# Altium PCB BEE-PC_EXP_V100.PcbDoc (part 3 of 7)
Units mm, origin at the board's own origin, x right, y up, seen from the top; angles counter-clockwise.
Board outline 180 x 79.98 mm, 6 copper layers (L1 TOP, L2 GND 1, L3 SIGNAL, L4 PWR, L5 GND 2, L6 BOT), stack 1.536 mm thick; 1146 components, 909 nets, 3933 pads, 1234 vias.
Unrouted connection lines stored in the file: 1783.
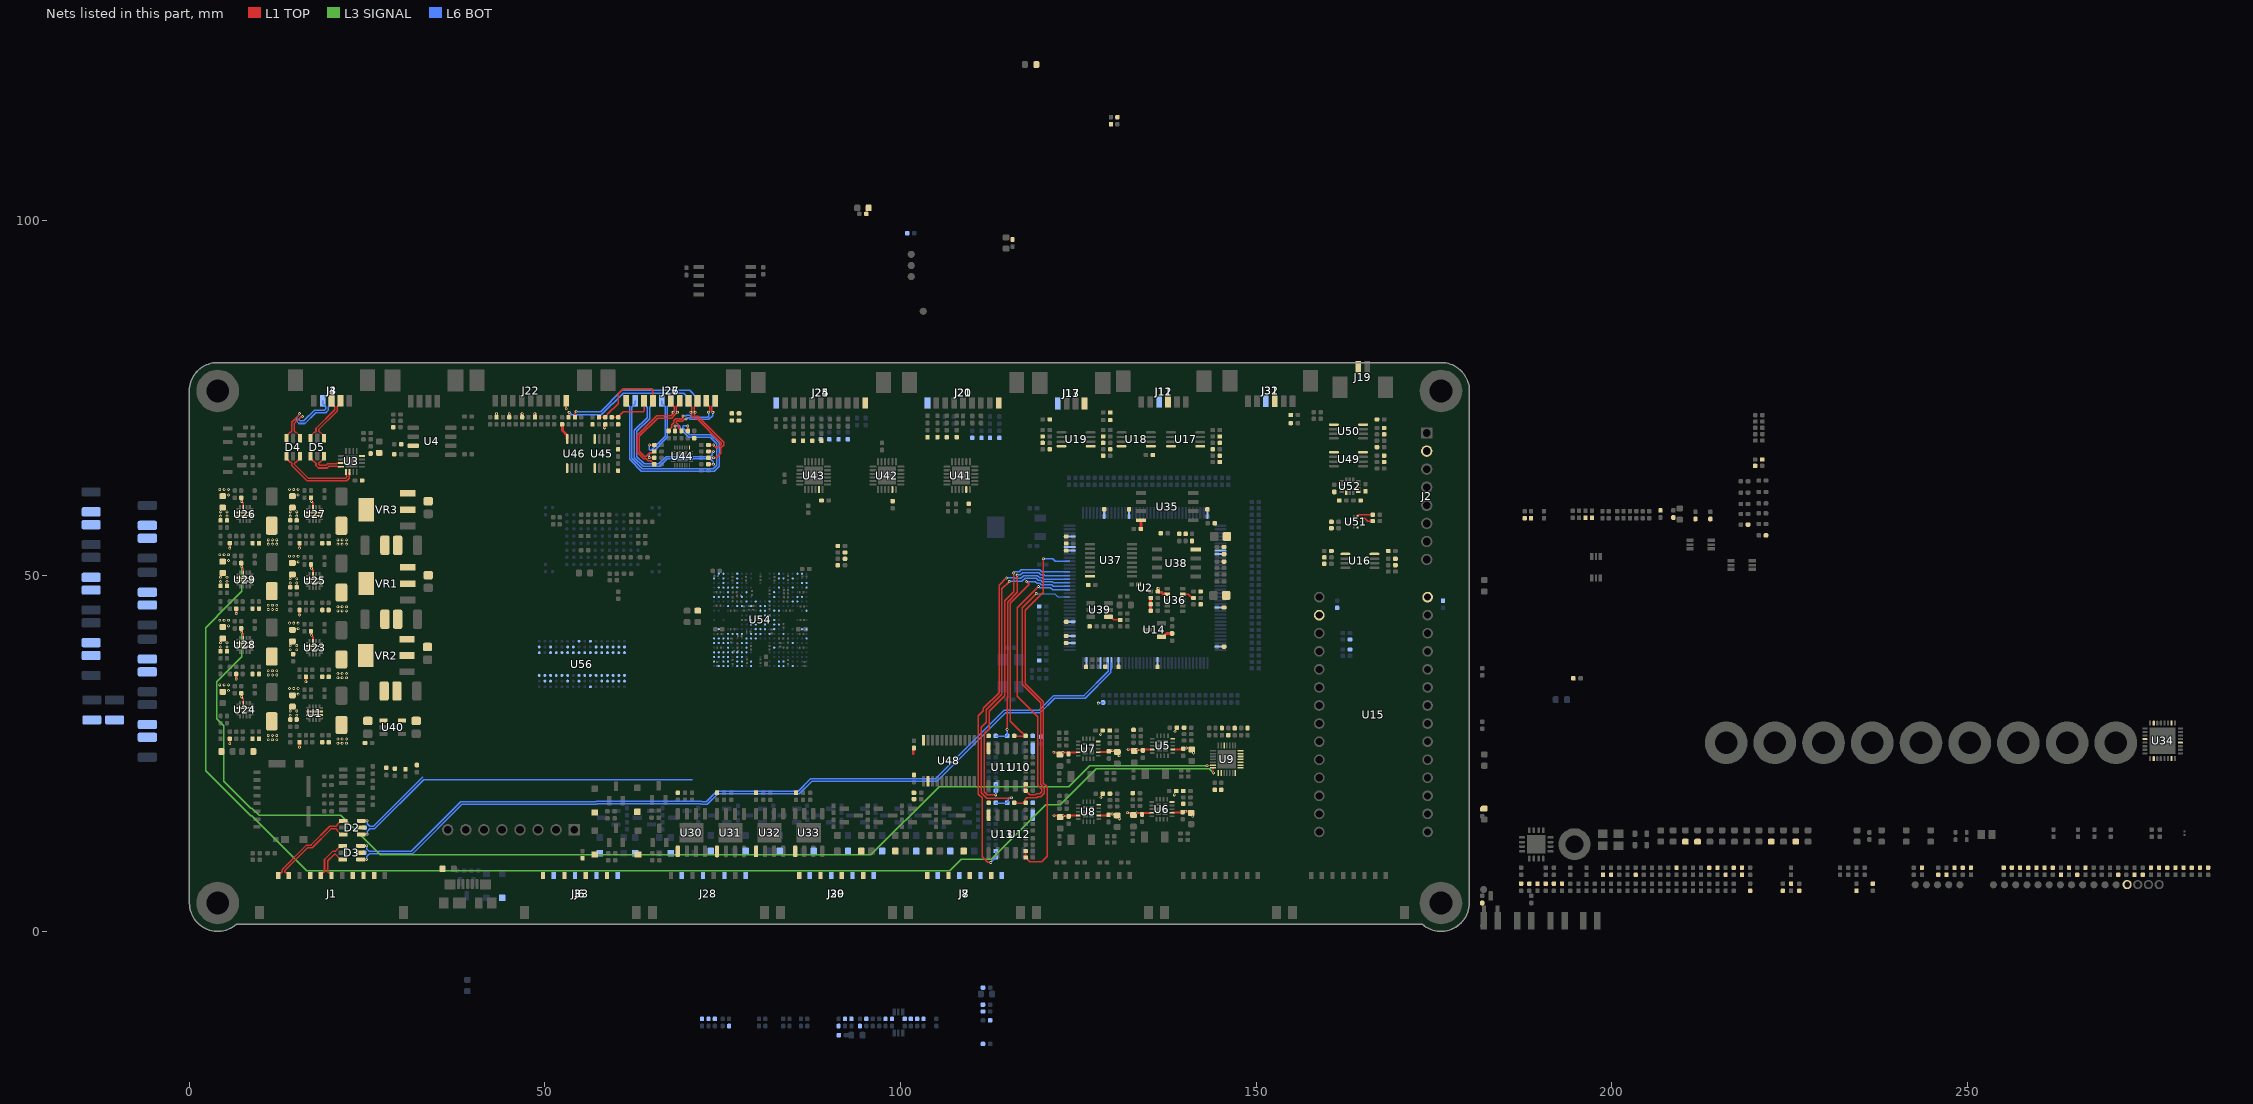
[diagram p4: the nets of this part, all layers, seen from the top]

## Footprints (in the part's own frame and the unit in brackets; to place one, negate y for a bottom-side part, rotate by r counter-clockwise, add the part's x,y. Pads: shape width x height; smd on the part's side, far side on the other; paste and mask are expansions set on the pad) (continued)
SOT95P280X145-6N [mm]
  rrect25% 1.21x0.59 smd: 1(-1.255,0.95) 2(-1.255,0) 3(-1.255,-0.95) 4(1.255,-0.95) 5(1.255,0) 6(1.255,0.95)
  silkscreen extent -1.9,-1.5 0.82,1.5, body extent -1.4,-1.46 1.4,1.46, height 1.4
SOT-23-3 [mm]
  rrect25% 1.32x0.6 smd: 1(-1,0.95) 2(-1,-0.95) 3(1,0)
  silkscreen extent -1.6,-1.5 0.7,1.5, body extent -1.3,-1.52 1.3,1.52, height 1.2
Testpoint_TH_D130H80 [mm]
  round 1.3 hole 0.8 paste-2539.97 mask+0: 0(0,0)
Testpoint_TH_D450H250 [mm]
  round 4.5 / inner round 3.5 / far side round 4.5 hole 2.5 paste-2539.97 mask+0: 1(0,0)
TFBGA-343_14x14 [mm] "BGA, 343-Leads, Body 14,00mm x14,00mm, Pitch 0,65mm"
  round 0.3 smd mask+0.05: A1(-6.5,6.5) A2(-5.85,6.5) A3(-5.2,6.5) A4(-4.55,6.5) A5(-3.9,6.5) A6(-3.25,6.5) A7(-2.6,6.5) A8(-1.95,6.5) A9(-1.3,6.5) A11(0,6.5) A13(1.3,6.5) A14(1.95,6.5) A15(2.6,6.5) A16(3.25,6.5) A17(3.9,6.5) A18(4.55,6.5) A19(5.2,6.5) A20(5.85,6.5) A21(6.5,6.5) AA1(-6.5,-6.5) AA2(-5.85,-6.5) AA3(-5.2,-6.5) AA4(-4.55,-6.5) AA5(-3.9,-6.5) AA6(-3.25,-6.5) AA7(-2.6,-6.5) AA8(-1.95,-6.5) AA9(-1.3,-6.5) AA11(0,-6.5) AA13(1.3,-6.5) AA14(1.95,-6.5) AA15(2.6,-6.5) AA16(3.25,-6.5) AA17(3.9,-6.5) AA18(4.55,-6.5) AA19(5.2,-6.5) AA20(5.85,-6.5) AA21(6.5,-6.5) B1(-6.5,5.85) B2(-5.85,5.85) B3(-5.2,5.85) B4(-4.55,5.85) B6(-3.25,5.85) B7(-2.6,5.85) B9(-1.3,5.85) B13(1.3,5.85) B15(2.6,5.85) B16(3.25,5.85) B18(4.55,5.85) B19(5.2,5.85) B20(5.85,5.85) B21(6.5,5.85) C1(-6.5,5.2) C2(-5.85,5.2) C3(-5.2,5.2) C4(-4.55,5.2) C5(-3.9,5.2) C6(-3.25,5.2) C7(-2.6,5.2) C8(-1.95,5.2) C11(0,5.2) C14(1.95,5.2) C15(2.6,5.2) C16(3.25,5.2) C17(3.9,5.2) C18(4.55,5.2) C19(5.2,5.2) C20(5.85,5.2) C21(6.5,5.2) D1(-6.5,4.55) D2(-5.85,4.55) D3(-5.2,4.55) D4(-4.55,4.55) D5(-3.9,4.55) D6(-3.25,4.55) D7(-2.6,4.55) D8(-1.95,4.55) D9(-1.3,4.55) D13(1.3,4.55) D14(1.95,4.55) D15(2.6,4.55) D16(3.25,4.55) D17(3.9,4.55) D18(4.55,4.55) D19(5.2,4.55) D20(5.85,4.55) D21(6.5,4.55) E1(-6.5,3.9) E3(-5.2,3.9) E4(-4.55,3.9) E5(-3.9,3.9) E6(-3.25,3.9) E7(-2.6,3.9) E8(-1.95,3.9) E14(1.95,3.9) E15(2.6,3.9) E16(3.25,3.9) E17(3.9,3.9) E18(4.55,3.9) E19(5.2,3.9) E21(6.5,3.9) F1(-6.5,3.25) F2(-5.85,3.25) F3(-5.2,3.25) F4(-4.55,3.25) F5(-3.9,3.25) F6(-3.25,3.25) F7(-2.6,3.25) F8(-1.95,3.25) F9(-1.3,3.25) F13(1.3,3.25) F14(1.95,3.25) F15(2.6,3.25) F16(3.25,3.25) F17(3.9,3.25) F18(4.55,3.25) F19(5.2,3.25) F20(5.85,3.25) F21(6.5,3.25) G1(-6.5,2.6) G2(-5.85,2.6) G3(-5.2,2.6) G4(-4.55,2.6) G5(-3.9,2.6) G6(-3.25,2.6) G7(-2.6,2.6) G8(-1.95,2.6) G9(-1.3,2.6) G10(-0.65,2.6) G11(0,2.6) G12(0.65,2.6) G13(1.3,2.6) G14(1.95,2.6) G15(2.6,2.6) G16(3.25,2.6) G17(3.9,2.6) G18(4.55,2.6) G19(5.2,2.6) G20(5.85,2.6) G21(6.5,2.6) H1(-6.5,1.95) H3(-5.2,1.95) H4(-4.55,1.95) H5(-3.9,1.95) H6(-3.25,1.95) H7(-2.6,1.95) H8(-1.95,1.95) H9(-1.3,1.95) H10(-0.65,1.95) H11(0,1.95) H12(0.65,1.95) H13(1.3,1.95) H14(1.95,1.95) H15(2.6,1.95) H16(3.25,1.95) H17(3.9,1.95) H18(4.55,1.95) H19(5.2,1.95) H21(6.5,1.95) J1(-6.5,1.3) J2(-5.85,1.3) J4(-4.55,1.3) J6(-3.25,1.3) J7(-2.6,1.3) J8(-1.95,1.3) J9(-1.3,1.3) J10(-0.65,1.3) J11(0,1.3) J12(0.65,1.3) J13(1.3,1.3) J14(1.95,1.3) J15(2.6,1.3) J16(3.25,1.3) J18(4.55,1.3) J20(5.85,1.3) J21(6.5,1.3) K7(-2.6,0.65) K8(-1.95,0.65) K9(-1.3,0.65) K10(-0.65,0.65) K11(0,0.65) K12(0.65,0.65) K13(1.3,0.65) K14(1.95,0.65) K15(2.6,0.65) L1(-6.5,0) L3(-5.2,0) L7(-2.6,0) L8(-1.95,0) L9(-1.3,0) L11(0,0) L13(1.3,0) L14(1.95,0) L15(2.6,0) L19(5.2,0) L21(6.5,0) M7(-2.6,-0.65) M8(-1.95,-0.65) M9(-1.3,-0.65) M10(-0.65,-0.65) M11(0,-0.65) M12(0.65,-0.65) M13(1.3,-0.65) M14(1.95,-0.65) M15(2.6,-0.65) N1(-6.5,-1.3) N2(-5.85,-1.3) N4(-4.55,-1.3) N6(-3.25,-1.3) N7(-2.6,-1.3) N8(-1.95,-1.3) N9(-1.3,-1.3) N10(-0.65,-1.3) N11(0,-1.3) N12(0.65,-1.3) N13(1.3,-1.3) N14(1.95,-1.3) N15(2.6,-1.3) N16(3.25,-1.3) N18(4.55,-1.3) N20(5.85,-1.3) N21(6.5,-1.3) P1(-6.5,-1.95) P3(-5.2,-1.95) P4(-4.55,-1.95) P5(-3.9,-1.95) P6(-3.25,-1.95) P7(-2.6,-1.95) P8(-1.95,-1.95) P9(-1.3,-1.95) P10(-0.65,-1.95) P11(0,-1.95) P12(0.65,-1.95) P13(1.3,-1.95) P14(1.95,-1.95) P15(2.6,-1.95) P16(3.25,-1.95) P17(3.9,-1.95) P18(4.55,-1.95) P19(5.2,-1.95) P21(6.5,-1.95) R1(-6.5,-2.6) R2(-5.85,-2.6) R3(-5.2,-2.6) R4(-4.55,-2.6) R5(-3.9,-2.6) R6(-3.25,-2.6) R7(-2.6,-2.6) R8(-1.95,-2.6) R9(-1.3,-2.6) R10(-0.65,-2.6) R11(0,-2.6) R12(0.65,-2.6) R13(1.3,-2.6) R14(1.95,-2.6) R15(2.6,-2.6) R16(3.25,-2.6) R17(3.9,-2.6) R18(4.55,-2.6) R19(5.2,-2.6) R20(5.85,-2.6) R21(6.5,-2.6) T1(-6.5,-3.25) T2(-5.85,-3.25) T3(-5.2,-3.25) T4(-4.55,-3.25) T5(-3.9,-3.25) T6(-3.25,-3.25) T7(-2.6,-3.25) T8(-1.95,-3.25) T9(-1.3,-3.25) T13(1.3,-3.25) T14(1.95,-3.25) T15(2.6,-3.25) T16(3.25,-3.25) T17(3.9,-3.25) T18(4.55,-3.25) T19(5.2,-3.25) T20(5.85,-3.25) T21(6.5,-3.25) U1(-6.5,-3.9) U3(-5.2,-3.9) U4(-4.55,-3.9) U5(-3.9,-3.9) U6(-3.25,-3.9) U7(-2.6,-3.9) U8(-1.95,-3.9) U14(1.95,-3.9) U15(2.6,-3.9) U16(3.25,-3.9) U17(3.9,-3.9) U18(4.55,-3.9) U19(5.2,-3.9) U21(6.5,-3.9) V1(-6.5,-4.55) V2(-5.85,-4.55) V3(-5.2,-4.55) V4(-4.55,-4.55) V5(-3.9,-4.55) V6(-3.25,-4.55) V7(-2.6,-4.55) V8(-1.95,-4.55) V9(-1.3,-4.55) V13(1.3,-4.55) V14(1.95,-4.55) V15(2.6,-4.55) V16(3.25,-4.55) V17(3.9,-4.55) V18(4.55,-4.55) V19(5.2,-4.55) V20(5.85,-4.55) V21(6.5,-4.55) W1(-6.5,-5.2) W2(-5.85,-5.2) W3(-5.2,-5.2) W4(-4.55,-5.2) W5(-3.9,-5.2) W6(-3.25,-5.2) W7(-2.6,-5.2) W8(-1.95,-5.2) W11(0,-5.2) W14(1.95,-5.2) W15(2.6,-5.2) W16(3.25,-5.2) W17(3.9,-5.2) W18(4.55,-5.2) W19(5.2,-5.2) W20(5.85,-5.2) W21(6.5,-5.2) Y1(-6.5,-5.85) Y2(-5.85,-5.85) Y3(-5.2,-5.85) Y4(-4.55,-5.85) Y6(-3.25,-5.85) Y7(-2.6,-5.85) Y9(-1.3,-5.85) Y13(1.3,-5.85) Y15(2.6,-5.85) Y16(3.25,-5.85) Y18(4.55,-5.85) Y19(5.2,-5.85) Y20(5.85,-5.85) Y21(6.5,-5.85)
  silkscreen extent -7.15,-7.15 7.15,7.15, body extent -7,-7 7,7, height 1.22
TP_1mm_SMD [mm]
  round 1 smd paste+0 mask+0.05: 0(0,0)
TSOP8 [mm] "TSOP, 8-Leads, Body 3x3mm, Pitch 0.65mm, IPC High Density"
  oval 1.4x0.35 smd mask+0.051: 1(-2.05,0.975) 2(-2.05,0.325) 3(-2.05,-0.325) 4(-2.05,-0.975) 5(2.05,-0.975) 6(2.05,-0.325) 7(2.05,0.325) 8(2.05,0.975)
  silkscreen extent -2.7,-1.6 1.6,1.6, body extent -2.35,-1.5 2.35,1.5, height 1.5
TWBGA96_ISI [mm]
  round 0.406 smd paste+0 mask+0: A1(-3.2,6) A2(-2.4,6) A3(-1.6,6) A7(1.6,6) A8(2.4,6) A9(3.2,6) B1(-3.2,5.2) B2(-2.4,5.2) B3(-1.6,5.2) B7(1.6,5.2) B8(2.4,5.2) B9(3.2,5.2) C1(-3.2,4.4) C2(-2.4,4.4) C3(-1.6,4.4) C7(1.6,4.4) C8(2.4,4.4) C9(3.2,4.4) D1(-3.2,3.6) D2(-2.4,3.6) D3(-1.6,3.6) D7(1.6,3.6) D8(2.4,3.6) D9(3.2,3.6) E1(-3.2,2.8) E2(-2.4,2.8) E3(-1.6,2.8) E7(1.6,2.8) E8(2.4,2.8) E9(3.2,2.8) F1(-3.2,2) F2(-2.4,2) F3(-1.6,2) F7(1.6,2) F8(2.4,2) F9(3.2,2) G1(-3.2,1.2) G2(-2.4,1.2) G3(-1.6,1.2) G7(1.6,1.2) G8(2.4,1.2) G9(3.2,1.2) H1(-3.2,0.4) H2(-2.4,0.4) H3(-1.6,0.4) H7(1.6,0.4) H8(2.4,0.4) H9(3.2,0.4) J1(-3.2,-0.4) J2(-2.4,-0.4) J3(-1.6,-0.4) J7(1.6,-0.4) J8(2.4,-0.4) J9(3.2,-0.4) K1(-3.2,-1.2) K2(-2.4,-1.2) K3(-1.6,-1.2) K7(1.6,-1.2) K8(2.4,-1.2) K9(3.2,-1.2) L1(-3.2,-2) L2(-2.4,-2) L3(-1.6,-2) L7(1.6,-2) L8(2.4,-2) L9(3.2,-2) M1(-3.2,-2.8) M2(-2.4,-2.8) M3(-1.6,-2.8) M7(1.6,-2.8) M8(2.4,-2.8) M9(3.2,-2.8) N1(-3.2,-3.6) N2(-2.4,-3.6) N3(-1.6,-3.6) N7(1.6,-3.6) N8(2.4,-3.6) N9(3.2,-3.6) P1(-3.2,-4.4) P2(-2.4,-4.4) P3(-1.6,-4.4) P7(1.6,-4.4) P8(2.4,-4.4) P9(3.2,-4.4) R1(-3.2,-5.2) R2(-2.4,-5.2) R3(-1.6,-5.2) R7(1.6,-5.2) R8(2.4,-5.2) R9(3.2,-5.2) T1(-3.2,-6) T2(-2.4,-6) T3(-1.6,-6) T7(1.6,-6) T8(2.4,-6) T9(3.2,-6)
  Keep-Out Layer region: -4.045,-6.844 -4.045,6.844 4.045,6.844 4.045,-6.844
  silkscreen extent -5.31,-7.3 5.31,7.3, body extent -5.05,-7.05 5.05,7.05, height 1.2
UQFN-16_4X4_EP2.6X2.6 [mm]
  rrect50% 0.8x0.35 smd paste+0 mask+0.075: 1(-2,0.975) 2(-2,0.325) 3(-2,-0.325) 4(-2,-0.975) 9(2,-0.975) 10(2,-0.325) 11(2,0.325) 12(2,0.975)
  rrect50% 0.35x0.8 smd paste+0 mask+0.057: 5(-0.975,-2) 6(-0.325,-2) 7(0.325,-2) 8(0.975,-2) 13(0.975,2) 14(0.325,2) 15(-0.325,2) 16(-0.975,2)
  rect 2.6x2.6 smd paste-0.25 mask+0.075: 17(0,0)
  silkscreen extent -2.15,-2.15 2.15,2.15, body extent -2,-2 2,2, height 0.5
VQFN-HR-10 [mm]
  rect 0.65x0.3 smd: 1(-0.938,0.692) 4(-0.941,-0.708) 7(0.909,-0.708) 10(0.909,0.692)
  rect 0.25x0.65 smd: 1(-0.738,0.867) 4(-0.741,-0.883) 7(0.709,-0.883) 10(0.709,0.867)
  rect 0.65x0.25 smd: 2(-0.938,0.216) 3(-0.941,-0.233) 8(0.909,-0.233) 9(0.909,0.216)
  rect 0.3x2.4 smd: 5(-0.265,-0.008) 6(0.235,-0.007)
  silkscreen extent -1.3,-1.25 1.28,1.23, body extent -1.03,-1.01 0.97,0.99, height 1
VREG_LM1117MP-3.3/NOPB [mm]
  rect 2.15x0.95 smd: 1(-2.9,2.3) 2(-2.9,0) 3(-2.9,-2.3)
  rect 2.15x3.25 smd: 4(2.9,0)
  silkscreen extent -4,-3.3 1.8,3.3, body extent -3.5,-3.25 3.5,3.25, height 1.8

## Part data
C1 C2 C6 C7 C8 C17 C18 C37 C43 C44 C47 C48 C65 C66 C69 C70 C122 C123 C134 C135 C139 C140 C142 C143 C144 C147 C148 C149 C150 C157 C158 C159 C160 C161 C163 C164 C170 C171 C175 C176 C182 C183 C190 C220 C221 C224 C225 C226 C227 C228 C229 C230 C231 C232 C233 C234 C235 C250 C266 C267 C280 C292 C330 C343 C350: library part _CAP_C_High_2, "CAP CHIP High Value"
C3 C4 C5 C9 C10 C11 C12 C13 C14 C15 C16 C19 C20 C21 C22 C23 C24 C25 C26 C27 C28 C29 C30 C31 C32 C33 C34 C35 C36 C38 C39 C40 C41 C42 C45 C46 C49 C50 C51 C52 C53 C54 C55 C56 C57 C58 C59 C60 C61 C62 C63 C64 C67 C68 C71 C72 C73 C74 C75 C76 C77 C78 C79 C80 C81 C82 C83 C84 C85 C86 C87 C88 C89 C90 C91 C92 C93 C94 C95 C96 C97 C98 C99 C100 C101 C102 C103 C104 C105 C106 C107 C108 C109 C110 C111 C112 C113 C114 C115 C116 C117 C118 C119 C120 C121 C124 C125 C126 C127 C128 C129 C130 C131 C132 C133 C136 C137 C138 C141 C145 C146 C151 C152 C153 C154 C155 C156 C162 C165 C166 C167 C168 C169 C172 C173 C174 C177 C178 C179 C180 C181 C184 C185 C186 C187 C188 C189 C191 C192 C193 C194 C195 C196 C197 C198 C199 C200 C201 C202 C203 C204 C205 C206 C207 C208 C209 C210 C211 C212 C213 C214 C215 C216 C217 C218 C219 C222 C223 C236 C237 C238 C239 C240 C241 C242 C243 C244 C245 C246 C247 C248 C249 C251 C252 C253 C254 C255 C256 C257 C258 C259 C260 C261 C262 C263 C264 C265 C268 C269 C270 C271 C272 C273 C274 C275 C276 C277 C278 C279 C281 C282 C283 C284 C285 C286 C287 C288 C289 C290 C294 C296 C298 C300 C302 C304 C306 C308 C310 C312 C314 C316 C318 C320 C322 C324 C326 C328 C331 C332 C333 C334 C335 C336 C337 C338 C339 C340 C341 C342 C344 C345 C346 C347 C348 C349 C353 C354: library part _CAP_C_2, "CAP CHIP"
D1 D10 D11 D12 D13 D14 D15 D16: "DIODE SCHOTTKY 60V 3A DO214AA"
D2 D3 D4 D5: "17V Clamp 5A (8/20Âµs) Ipp Tvs Diode Surface Mount SOT-23-6", Package="SOT-23-6 STMicroelectronics", Availability="In Stock", Check_prices=https://www.snapeda.com/parts/USBLC6-2SC6/STMicroelectronics/view-part/?ref=eda, MF=STMicroelectronics, MP=USBLC6-2SC6, Price=None, Purchase-URL=https://pricing.snapeda.com/search/part/USBLC6-2SC6/?ref=eda, SnapEDA_Link=https://www.snapeda.com/parts/USBLC6-2SC6/STMicroelectronics/view-part/?ref=snap
D6 D7 D8 D9 D17 D18 D19 D20 D21 D22 D23 D24 D25 D26 D27 D28 D29 D30 D31 D32: library part "Diode SMD", "Default Diode", Code - JEDEC=DO-214-AB, Published=8-Jun-2000, Publisher="Altium Limited", Revision="July-2002: Re-released for DXP Platform."
DZ1 DZ2 DZ3 DZ4 DZ5 DZ6 DZ7 DZ8 DZ9 DZ10 DZ11 DZ12 DZ13 DZ14 DZ15 DZ16: library part "DIODE Zener", "Zenner"
H2 H3 H4 H5 H7 H8 H9 H10 H11 H12 H13 H14 H15 H16: library part HEX-M3
J1 J24 J25 J26 J27: library part "Header 11x1_2M"
J3 J4: library part "Header 5x1_2M"
J5 J6 J7 J8 J9 J10 J18 J28 J29 J30 J33: library part "Header 8x1_2M"
J11 J12 J31 J32: library part FLOW_SENSOR
J13 J16 J17: library part "Header 4x1_2M"
J14: library part USB_micro, "No Description Available", Mfr_Name="Molex Connector Corporation", RefDes=RefDes, TYPE=Type
J15: "9 (8 + 1) Position Card Connector Secure Digital - microSDâ„¢ Surface Mount, Right Angle Gold", Package=None, Check_prices=https://www.snapeda.com/parts/1051620001/Molex/view-part/?ref=eda, MF=Molex, MP=1051620001, SnapEDA_Link=https://www.snapeda.com/parts/1051620001/Molex/view-part/?ref=snap
J19: library part "Header 2x1_2M"
J20 J21 J22: library part "Header 9x1_2M"
JP1 JP2 JP3 JP4 JP5 JP6 JP7 JP8 JP9 JP10 JP11 JP12: library part JUMPER_1_1
L1 L2 L3 L4: library part L-SMD-1, Inductance="1.0 μH", Manufacturer="Wurth Elektronik", partNo=78477010, ComponentLink1Description=Manufacturer, ComponentLink1URL=http://www.we-online.de, ComponentLink2Description=Datasheet, ComponentLink2URL=http://katalog.we-online.de/pbs/datasheet/78477010.pdf, Created by="Baojun Chen", Created Date=Nov.2015
L5 L6 L7 L8: library part IND1335, Manufacturer 1="Murata Electronics North America", Manufacturer Part Number 1=DFE252012P-1R5M=P2, Package=1008, RMS Current=3.5A, Supplier Part Number 1=490-10648-6-ND, Test Frequency=1MHz, Category=Inductor, ComponentLink1Description="SVN Datasheet", ComponentLink1URL=https://chn-vm-apps.microchip.com/mchprepo/parts/Datasheets/m_dfe252012p.pdf, ComponentLink2Description="Local Datasheet", ComponentLink2URL=C:\ALTIUM_WORK\00001_MCHP-CDB\Datasheets\m_dfe252012p.pdf, ComponentLink3Description="Open Symbol", ComponentLink3URL=C:\ALTIUM_WORK\00001_MCHP-CDB\Library\LibraryRefs\Inductor.SchLib, ComponentLink4Description="Open Footprint", ComponentLink4URL=C:\ALTIUM_WORK\00001_MCHP-CDB\Library\Footprints\IND_C_1008.PcbLib, ComponentLink5Description="Open Footprint 2", ComponentLink6Description="Open Footprint 3", ComponentLink7Description="Open Footprint 4", DCR=0.06R, Description_="INDUCTOR 1.5uH 3.5A 20% SMD 1008", Dev Tools Status=Design, MCHP-ID=IND1335, Owner="Razvan Cristescu", Populated=YES, Quantity Override=1, Revision=A, Status="MCL Design", Supplier 1=Digi-Key, Symbol=Inductor, TYPE=Inductor
Q1 Q2: library part MOSFET_P_GSD
Q3 Q4 Q5 Q6 Q7 Q8 Q9 Q10 Q11 Q12 Q13 Q14 Q15 Q16 Q17 Q18 Q19 Q20 Q21 Q22: library part MOSFET_N, "N-Channel 30 V 5.7A (Ta) 1.4W (Ta) Surface Mount SOT-23-3", Package="SOT-23 Alpha &amp; Omega Semiconductor Inc.", Check_prices=https://www.snapeda.com/parts/AO3400A/Alpha/view-part/?ref=eda, MF="Alpha & Omega Semiconductor", MP=AO3400A, SnapEDA_Link=https://www.snapeda.com/parts/AO3400A/Alpha/view-part/?ref=snap
Q23: library part TRA1223, "Transistor MOS", Current=230mA, Drain to Source Voltage=60V, Gate to Source Voltage=20V, Manufacturer 1="Infineon Technologies", Manufacturer Part Number 1=BSS138NH6327XTSA2, Operating Temperature="-55C to +150C", Package=SOT23-3, Power=0.36W, Supplier Part Number 1=BSS138NH6327XTSA2CT-ND, Category=Transistor, ComponentLink1Description="SVN Datasheet", ComponentLink1URL=https://chn-vm-apps.microchip.com/mchprepo/parts/Datasheets/Infineon-BSS138N-DS-v02_86-en.pdf, ComponentLink2Description="Local Datasheet", ComponentLink2URL=C:\ALTIUM_WORK\00001_MCHP-CDB\Datasheets\Infineon-BSS138N-DS-v02_86-en.pdf, ComponentLink3Description="Open Symbol", ComponentLink3URL="C:\ALTIUM_WORK\00001_MCHP-CDB\Library\LibraryRefs\Transistor MOS-N GSD.SchLib", ComponentLink4Description="Open Footprint", ComponentLink4URL=C:\ALTIUM_WORK\00001_MCHP-CDB\Library\Footprints\SOT-23-3.PcbLib, ComponentLink5Description="Open Footprint 2", ComponentLink6Description="Open Footprint 3", ComponentLink7Description="Open Footprint 4", Description_="TRANS FET N-CH BSS138N 60V 230mA SOT23-3", Dev Tools Status=Production, MCHP-ID=TRA1223, Owner="Dragos Danaila", Populated=YES, Quantity Override=1, Revision=1, Status="MCL Design", Supplier 1=Digi-Key, Symbol="Transistor MOS-N GSD", TYPE=FET, Voltage=60V
R1 R2 R3 R4 R5 R6 R7 R8 R9 R10 R11 R12 R13 R14 R15 R16 R17 R18 R19 R20 R21 R22 R23 R24 R25 R26 R27 R28 R29 R30 R31 R32 R33 R34 R35 R36 R37 R38 R39 R40 R41 R42 R43 R44 R45 R46 R47 R48 R49 R50 R51 R52 R53 R54 R55 R56 R57 R58 R59 R60 R61 R62 R63 R64 R65 R66 R67 R68 R69 R70 R71 R72 R73 R74 R75 R76 R77 R78 R79 R80 R81 R82 R83 R84 R85 R86 R87 R88 R89 R90 R91 R92 R93 R94 R95 R96 R97 R98 R99 R100 R101 R102 R103 R104 R105 R106 R107 R108 R109 R110 R111 R112 R113 R114 R115 R116 R117 R118 R119 R120 R121 R122 R123 R124 R125 R126 R127 R128 R129 R130 R131 R132 R133 R134 R135 R136 R137 R138 R139 R140 R141 R142 R143 R144 R145 R146 R147 R148 R149 R150 R151 R152 R153 R154 R155 R156 R157 R158 R159 R160 R161 R162 R163 R164 R165 R166 R167 R168 R169 R170 R171 R172 R173 R174 R175 R176 R177 R178 R179 R180 R181 R182 R183 R184 R185 R186 R187 R188 R189 R190 R191 R192 R193 R194 R195 R196 R197 R198 R199 R200 R201 R202 R203 R204 R205 R206 R207 R208 R209 R210 R211 R212 R213 R214 R215 R216 R217 R218 R219 R220 R221 R222 R223 R224 R225 R226 R227 R228 R229 R230 R231 R232 R233 R234 R235 R236 R237 R238 R239 R240 R241 R242 R243 R244 R245 R246 R247 R248 R249 R250 R251 R252 R253 R254 R255 R256 R257 R258 R259 R260 R261 R262 R263 R264 R265 R266 R267 R268 R269 R270 R271 R272 R273 R274 R275 R276 R277 R278 R279 R280 R281 R282 R283 R284 R285 R286 R287 R288 R289 R290 R291 R292 R293 R294 R295 R296 R297 R298 R299 R300 R301 R302 R303 R304 R305 R306 R307 R308 R309 R310 R311 R312 R313 R314 R315 R316 R317 R318 R319 R320 R321 R322 R323 R324 R325 R327 R328 R329 R331 R332 R333 R336 R337 R338 R339 R340 R341 R342 R343 R344 R345 R346 R347 R348 R349 R350 R351 R352 R353 R354 R355 R356 R357 R358 R359 R360 R361 R362 R363 R364 R365 R366 R367 R368 R369 R370 R371 R372 R373 R374 R375 R376 R377 R378 R379 R380 R381 R382 R383 R384 R385 R386 R387 R388 R389 R390 R391 R392 R393 R394 R395 R396 R397 R398 R399 R400 R401 R402 R403 R404 R405 R406 R407 R408 R409 R410 R411 R412 R413 R414 R415 R416 R417 R418 R419 R420 R421 R422 R423 R424 R425 R426 R427 R428 R429 R430 R431 R432 R433 R434 R435 R436 R437 R438 R439 R440 R441 R442 R443 R444 R445 R446 R447 R448 R449 R450 R451 R452 R453 R454 R455 R456 R457 R458 R459 R460 R461 R462 R463 R464 R465 R466 R467 R468 R469 R470 R471 R472 R473 R474 R475 R476 R477 R478 R479 R480 R481 R482 R483 R484 R485 R486 R487 R488 R489 R490 R491 R492 R493 R494 R495 R496 R497 R498 R499 R500 R501 R502 R503 R504 R505 R506 R507 R508 R509 R510 R511 R512 R513 R514 R515 R516 R517 R518 R519 R520 R521 R522 R523 R524 R525 R526 R527 R528 R529 R530 R531 R532 R533 R534 R535 R536 R537 R538 R539 R540 R541 R542 R543 R544 R545 R546 R547 R548 R549 R550 R551 R552 R553 R554 R555 R556 R557 R558 R559 R560 R561 R562 R563 R564 R565 R566 R567 R568 R569 R570 R571 R572 R573 R574 R575 R576 R577 R578 R579 R580 R581: library part _RES_B_2, "RES"
R326 R330 R334 R335: library part RSMT1316, "Shunt", Current=8A, Manufacturer 1=SUSUMU, Manufacturer Part Number 1=KRL1632E-M-R010-F-T5, Operating Temperature="-55C to +155C", Package=1206, Power=0.75W, Supplier Part Number 1=408-1570-1-ND, Temperature Coeffcient=50ppm/C, Tolerance=1%, Category=Resistor, ComponentLink1Description="SVN Datasheet", ComponentLink1URL=https://chn-vm-apps.microchip.com/mchprepo/parts/Datasheets/n_catalog_partition09_en.pdf, ComponentLink2Description="Local Datasheet", ComponentLink2URL=C:\ALTIUM_WORK\00001_MCHP-CDB\Datasheets\n_catalog_partition09_en.pdf, ComponentLink3Description="Open Symbol", ComponentLink3URL="C:\ALTIUM_WORK\00001_MCHP-CDB\Library\LibraryRefs\Shunt 4 Pin.SchLib", ComponentLink4Description="Open Footprint", ComponentLink4URL=C:\ALTIUM_WORK\00001_MCHP-CDB\Library\Footprints\RES_C_1206_SHUNT.PcbLib, ComponentLink5Description="Open Footprint 2", ComponentLink6Description="Open Footprint 3", ComponentLink7Description="Open Footprint 4", Composition=MF, Description_="RES SHUNT MF 0.01R 1% 0.75W SMD 1206", Dev Tools Status=Design, MCHP-ID=RSMT1316, Owner="Ciprian Abramov", Populated=YES, Quantity Override=1, Revision=1, Status="MCL Design", Supplier 1=Digi-Key, Symbol="Shunt 4 Pin", TYPE="RES SMD"
TP1 TP2 TP3 TP4: library part "Test Point", "Test Point", Solder=NF
TP5 TP6 TP7 TP8 TP9 TP10 TP11 TP12 TP13 TP14 TP15 TP18 TP20 TP22 TP25 TP26 TP27 TP28 TP29 TP30 TP31 TP32 TP33 TP34: library part CON1759, "Test Point", Category=Connector, ComponentLink1Description="SVN Datasheet", ComponentLink2Description="Local Datasheet", ComponentLink3Description="Open Symbol", ComponentLink3URL="C:\ALTIUM_WORK\00001_MCHP-CDB\Library\LibraryRefs\Test Point No BOM.SchLib", ComponentLink4Description="Open Footprint", ComponentLink4URL=C:\ALTIUM_WORK\00001_MCHP-CDB\Library\Footprints\TP_1mm_SMD.PcbLib, ComponentLink5Description="Open Footprint 2", ComponentLink6Description="Open Footprint 3", ComponentLink7Description="Open Footprint 4", Description_="CON TP PAD PCB 1mm SMD", Dev Tools Status=Design, MCHP-ID=CON1759, Owner="Cristian Papuc", Populated=YES, Quantity Override=1, Revision=A, Status="MCL Design", Symbol="Test Point No BOM", TYPE="Test Point"
U2: library part A06-1541, "SAM 32-bit ARM Cortex-M* RISC MCU, SAMV71B Series, QFP144", Manufacturer=MICROCHIP, MPN=ATSAMV71Q21B-AAB, TemperatureRange="-40Â°C to +105Â°C", AN=A06-1541, Height=1,60000002384186, PartGroup="Integrated Circuits,MCU, MPU, DSP,ARM MCU"
U3: library part IC_USB_SW_FSUSB74MPX, "USB Switch IC 1 Channel 16-MLP (3x3)", Package="WQFN-16 ON Semiconductor", Check_prices=https://www.snapeda.com/parts/FSUSB74MPX/Onsemi/view-part/?ref=eda, MF="ON Semiconductor", MP=FSUSB74MPX, SnapEDA_Link=https://www.snapeda.com/parts/FSUSB74MPX/Onsemi/view-part/?ref=snap
U4: "Power Switch/Driver 1:2 N-Channel 1.25A 8-SOIC", Package="SO-8 Microchip", Check_prices=https://www.snapeda.com/parts/MIC2026-1YM/Microchip/view-part/?ref=eda, MF=Microchip, MP=MIC2026-1YM, SnapEDA_Link=https://www.snapeda.com/parts/MIC2026-1YM/Microchip/view-part/?ref=snap
U5 U6 U7 U8: library part LT8722
U9: library part IC_SW_MAX14662ETI+T, "8 Circuit IC Switch 1:1 1Ohm 28-TQFN _4x4_", Package="TQFN-28 Maxim", Availability=Unavailable, MF="Maxim Integrated", MP=MAX14662ETI+T, Price=None, SnapEDA_Link=https://www.snapeda.com/parts/MAX14662ETI%2BT/Maxim%20Integrated/view-part/546683/?ref=snap
U14: library part IC_SENSOR_TC1047AVNBTR, "Temperature Sensor Analog, Local -40°C ~ 125°C 10mV/°C SOT-23-3"
U15: library part mp_HighDriver4
U20 U21: library part IP4220CZ6_0, CLABCONF0=#NAME?, P/N=132D42200S, PCB Footprint=SOT23-6L
U30 U31 U32 U33: library part IC_H_bridge_TB67H451AFNG,EL, "BRUSHED MOTOR DRIVER IC, 50V, 3."
U34: library part MIC8878, Manufacturer 1="Microchip Technology", Supplier Part Number 1=150-MCP16502TAB-E/S8BCT-ND, Category=MCHP-Analog, ComponentLink1Description="SVN Datasheet", ComponentLink2Description="Local Datasheet", ComponentLink2URL=C:\ALTIUM_WORK\00001_MCHP-CDB\Datasheets\MCP16502-High-Performance-PMIC-for-SAMA5DX-SAM9X6-MPUs-Data-Sheet-DS20006275B.pdf, ComponentLink3Description="Open Symbol", ComponentLink3URL="C:\ALTIUM_WORK\00001_MCHP-CDB\Library\LibraryRefs\MCP16502 QFN-32.SchLib", ComponentLink4Description="Open Footprint", ComponentLink4URL=C:\ALTIUM_WORK\00001_MCHP-CDB\Library\Footprints\QFN-32_5X5_EP3.7X3.7.PcbLib, ComponentLink5Description="Open Footprint 2", ComponentLink6Description="Open Footprint 3", ComponentLink7Description="Open Footprint 4", Description_="MCHP ANALOG PMIC SWITCHER Buck ADJ MCP16502TAB-E/S8B QFN-32 for SAMA7G5 MPU with LPDDR/DDR2/DDR3", Dev Tools Status=Design, Manufacturer Part Number 1=MCP16502TAB-E/S8B, MCHP-ID=MIC8878, Owner="Dragos Danaila", Populated=YES, Quantity Override=1, Revision=1, Status="MCL Design", Supplier 1=Digi-Key, Symbol="MCP16502 QFN-32", TYPE=Switcher
U35 U47: library part IC_RAM_AS3004204-0108X0PSAY
U36: library part RV-3129-C3_32.768KHZ_OPTION_A_TB_QA, "Real-Time Clock Module, Temperature compensated, in 2.5 x 3.7 mm package", Package="QFN-10 Micro Crystal", Check_prices=https://www.snapeda.com/parts/RV-3129-C3%2032.768KHZ%20OPTION%20A%20TB%20QA/Micro+Crystal/view-part/?ref=eda, MF="Micro Crystal", MP="RV-3129-C3 32.768KHZ OPTION A TB QA", SnapEDA_Link=https://www.snapeda.com/parts/RV-3129-C3%2032.768KHZ%20OPTION%20A%20TB%20QA/Micro+Crystal/view-part/?ref=snap
U37: library part IC_SW_SPI_SN3257QPWRQ1, "Automotive 5-V, 2:1 (SPDT), 4-channel switch with 1.8-V logic and powered-off protection 16-TSSOP -40 to 125", Manufacturer_Name="Texas Instruments", Copyright="Copyright (C) 2025 Ultra Librarian. All rights reserved.", Datasheet=https://www.ti.com/lit/gpn/sn3257-q1, Manufacturer_Part_Number=SN3257QPWRQ1, RefDes=RefDes, TYPE=Type
U38: library part IS66WVS4M8BLL-104NLI, "No Description Available", Manufacturer_Name=ISSI, Copyright="Copyright (C) 2025 Ultra Librarian. All rights reserved.", Manufacturer_Part_Number=IS66WVS4M8BLL-104NLI, RefDes=RefDes, TYPE=Memory
U39: Package=None, Availability=Unavailable, MP=TPL5010QDDCTQ1, Price=None
U40: library part IC_POWER_AP7347DQ
U41 U42 U43: library part CMP-04892-000110-1, "IC MUX/DEMUX 1X2 24WQFN", Case/Package=QFN, Max Operating Temperature=105°C, Max Supply Voltage=3.6V, Min Operating Temperature=-40°C, Min Supply Voltage=1.65V, On-State Resistance=6.2R, Operating Supply Current=40nA, Package Quantity=1, -3db Bandwidth=240MHz, Bandwidth=240MHz, Lead Free="Lead Free", Logic Function=Multiplexer, Mount="Surface Mount", Number of Channels=6, Number of Circuits=6, Number of Pins=24, Packaging="Tape and Reel", RoHS Compliant=Yes, Series="Automotive, AEC-Q100", Supply Type=Single, Turn-Off Delay Time=70ns, Turn-On Delay Time=68ns
U44: Mfr_Name="Diodes Inc", RefDes=RefDes, TYPE=Type
U48: library part IC_I2Cto16IO_TCA6416APWR
U51: "Description", Manufacturer_Name="Bosch Sensortec", Copyright="Copyright (C) 2025 Ultra Librarian. All rights reserved.", Manufacturer_Part_Number=BMP390, RefDes=RefDes, TYPE=Type
U52: "Accelerometer, Gyroscope, 6 Axis Sensor I2C, SPI Output", Package="VFLGA-14 STMicroelectronics", Check_prices=https://www.snapeda.com/parts/LSM6DSOXTR/STMicroelectronics/view-part/?ref=eda, MF=STMicroelectronics, MP=LSM6DSOXTR, SnapEDA_Link=https://www.snapeda.com/parts/LSM6DSOXTR/STMicroelectronics/view-part/?ref=snap
U53: library part MIC8883, Manufacturer 1="Microchip Technology", Manufacturer Part Number 1=PAC1934T-I/JQ, Supplier Part Number 1=PAC1934T-I/JQCT-ND, Category=MCHP-Analog, ComponentLink1Description="SVN Datasheet", ComponentLink2Description="Local Datasheet", ComponentLink3Description="Open Symbol", ComponentLink3URL="C:\ALTIUM_WORK\00001_MCHP-CDB\Library\LibraryRefs\PAC1934 UQFN-16.SchLib", ComponentLink4Description="Open Footprint", ComponentLink4URL=C:\ALTIUM_WORK\00001_MCHP-CDB\Library\Footprints\UQFN-16_4X4_EP2.6X2.6.PcbLib, ComponentLink5Description="Open Footprint 2", ComponentLink6Description="Open Footprint 3", ComponentLink7Description="Open Footprint 4", Description_="MCHP ANALOG POWER CURRENT SENSE MONITOR PAC1934T-I/JQ UQFN-16", Dev Tools Status=Design, MCHP-ID=MIC8883, Owner="Ciprian Abramov", Populated=YES, Quantity Override=1, Revision=1, Status="MCL Design", Supplier 1=Digi-Key, Symbol="PAC1934 UQFN-16", TYPE="Power/Current Sensor"
U54: library part MIC8923, "SAMA7G54 MPU 1000MHz Cortex-A7 TFBGA-343", Manufacturer 1=Microchip, Manufacturer Part Number 1=SAMA7G54-V/4HB, Package=TFBGA-343, Category=MCHP-Microcontroller, ComponentLink1Description="SVN Datasheet", ComponentLink2Description="Local Datasheet", ComponentLink3Description="Open Symbol", ComponentLink3URL="C:\ALTIUM_WORK\00001_MCHP-CDB\Library\LibraryRefs\SAMA7G54 TFBGA-343.SchLib", ComponentLink4Description="Open Footprint", ComponentLink4URL=C:\ALTIUM_WORK\00001_MCHP-CDB\Library\Footprints\TFBGA-343_14x14.PcbLib, ComponentLink5Description="Open Footprint 2", ComponentLink6Description="Open Footprint 3", ComponentLink7Description="Open Footprint 4", Description_="MCHP MPU 32-BIT Cortex-A7 1000MHz 128kB SAMA7G54-V/4HB TFBGA-343", Dev Tools Status=Design, MCHP-ID=MIC8923, Owner="Ciprian Abramov", Populated=YES, Quantity Override=1, Revision=1, Status="MCL Design", Supplier 1=Microchip, Supplier Part Number 1=SAMA7G54-V/4HB, Symbol="SAMA7G54 TFBGA-343", TYPE="32-Bit MPU"
U56: library part IC_RAM_IS43TR16512BL-125KBLI, "DDR3L", Manufacturer_Name=ISSI, Copyright="Copyright (C) 2025 Ultra Librarian. All rights reserved.", Manufacturer_Part_Number=IS43TR16512BL-125KBLI, RefDes=RefDes, TYPE=Type
VR1 VR2 VR3: "800-mA 15-V linear voltage regulator", Package="SOT-223-4 Texas Instruments", Check_prices=https://www.snapeda.com/parts/LM1117MP-3.3/NOPB/Texas+Instruments/view-part/?ref=eda, MF="Texas Instruments", MP=LM1117MP-3.3/NOPB, SnapEDA_Link=https://www.snapeda.com/parts/LM1117MP-3.3/NOPB/Texas+Instruments/view-part/?ref=snap
XC1: library part A07-0052, "32k768 crystal, +-20ppm, CL=7pF, max ESR 60kOhm, SMD", Manufacturer="Micro Crystal", MPN="MS1V-T1K 32.768kHz 7pF +/-20PPM TA", TemperatureRange="-40 /+85", Tolerance="+/- 20 PPM", AN=A07-0052, Height=2,07999992370605, PartGroup="Frequency devices,Crystals,SMD"
XC2: library part A07-0042, "Fox FQ5032B 12.0MHz SMD crystal 738B-12", Manufacturer="Fox  Electronics", MPN=FQ5032B-12.000, TemperatureRange="0Â°C ~ 70Â°C", Tolerance=Â±30ppm, AN=A07-0042, Height=1,20000004768372, PartGroup="Frequency devices,Crystals,SMD"
Y1: library part OSC1092, "Crystal", Load Capacitance=12.5pF, Manufacturer 1=NDK, Manufacturer Part Number 1=NX2012SA-32.768K-STD-MUB-1, Supplier Part Number 1=644-1219-1-ND, Tolerance=±20ppm, Category=Crystal/Oscillator, ComponentLink1Description="SVN Datasheet", ComponentLink1URL=https://chn-vm-apps.microchip.com/mchprepo/parts/Datasheets/c_NX2012SA-STD-MUB-1_e.pdf, ComponentLink2Description="Local Datasheet", ComponentLink2URL=C:\ALTIUM_WORK\00001_MCHP-CDB\Datasheets\c_NX2012SA-STD-MUB-1_e.pdf, ComponentLink3Description="Open Symbol", ComponentLink3URL="C:\ALTIUM_WORK\00001_MCHP-CDB\Library\LibraryRefs\Crystal 2 Pins.SchLib", ComponentLink4Description="Open Footprint", ComponentLink4URL=C:\ALTIUM_WORK\00001_MCHP-CDB\Library\Footprints\CRYSTAL_NX2012SA.PcbLib, ComponentLink5Description="Open Footprint 2", ComponentLink6Description="Open Footprint 3", ComponentLink7Description="Open Footprint 4", Description_="CRYSTAL 32.768kHz 12.5pF SMD NX2012SA", Dev Tools Status=Production, MCHP-ID=OSC1092, Owner="Jamus Griego", Populated=YES, Quantity Override=1, Revision=1, Status="MCL Design", Supplier 1=Digi-Key, Symbol="Crystal 2 Pins", TYPE=Crystal
Y2: library part MIC6659, Manufacturer 1="Microchip Technology", Manufacturer Part Number 1=DSC1001DI5-024.0000T, Supplier Part Number 1=DSC1001DI5-024.0000T-ND, Category=MCHP-Clock/Timing, ComponentLink1Description="SVN Datasheet", ComponentLink2Description="Local Datasheet", ComponentLink3Description="Open Symbol", ComponentLink3URL="C:\ALTIUM_WORK\00001_MCHP-CDB\Library\LibraryRefs\DSC10xx DFN-4.SchLib", ComponentLink4Description="Open Footprint", ComponentLink4URL=C:\ALTIUM_WORK\00001_MCHP-CDB\Library\Footprints\DFN-4_2.5x2.PcbLib, ComponentLink5Description="Open Footprint 2", ComponentLink6Description="Open Footprint 3", ComponentLink7Description="Open Footprint 4", Description_="MCHP CLOCK OSCILLATOR SINGLE 24MHz DSC1001DI5-024.0000 SMD-2520", Dev Tools Status=Design, MCHP-ID=MIC6659, Owner="Maurizio Gavardoni", Populated=YES, Quantity Override=1, Revision=A, Status="MCL Design", Supplier 1=Digi-Key, Symbol="DSC10xx DFN-4", TYPE=Oscillator
Y3: library part OSC1047, "Crystal", Load Capacitance=18pF, Manufacturer 1="Abracon Corporation", Manufacturer Part Number 1=ABM8G-24.000MHZ-18-D2Y-T, Package=ABM8G, Supplier Part Number 1=535-10273-1-ND, Category=Crystal/Oscillator, ComponentLink1Description="SVN Datasheet", ComponentLink1URL=https://chn-vm-apps.microchip.com/mchprepo/parts/Datasheets/ABM8G.pdf, ComponentLink2Description="Local Datasheet", ComponentLink2URL=C:\ALTIUM_WORK\00001_MCHP-CDB\Datasheets\ABM8G.pdf, ComponentLink3Description="Open Symbol", ComponentLink3URL="C:\ALTIUM_WORK\00001_MCHP-CDB\Library\LibraryRefs\Crystal 4 Pins.SchLib", ComponentLink4Description="Open Footprint", ComponentLink4URL=C:\ALTIUM_WORK\00001_MCHP-CDB\Library\Footprints\CRYSTAL_ABM8G.PcbLib, ComponentLink5Description="Open Footprint 2", ComponentLink6Description="Open Footprint 3", ComponentLink7Description="Open Footprint 4", Description_="CRYSTAL 24MHz 18pF SMD ABM8G", Dev Tools Status=Production, MCHP-ID=OSC1047, Owner="Mark Loper", Populated=DNP, Quantity Override=1, Revision=1, Status="MCL Design", Supplier 1=Digi-Key, Symbol="Crystal 4 Pins", TYPE=Crystal
Y4: library part MIC8888, Manufacturer 1="Microchip Technology", Manufacturer Part Number 1=DSC6003MA3B-032K768, Supplier Part Number 1=DSC6003MA3B-032K768-ND, Category=MCHP-Clock/Timing, ComponentLink1Description="SVN Datasheet", ComponentLink2Description="Local Datasheet", ComponentLink3Description="Open Symbol", ComponentLink3URL="C:\ALTIUM_WORK\00001_MCHP-CDB\Library\LibraryRefs\DSC60xx DFN-4_LGA-4.SchLib", ComponentLink4Description="Open Footprint", ComponentLink4URL=C:\ALTIUM_WORK\00001_MCHP-CDB\Library\Footprints\DFN-4_2x1.6.PcbLib, ComponentLink5Description="Open Footprint 2", ComponentLink6Description="Open Footprint 3", ComponentLink7Description="Open Footprint 4", Description_="MCHP CLOCK OSCILLATOR SINGLE 32.768KHz DSC6003MA3B-032K768 SMD DFN-4", Dev Tools Status=Design, MCHP-ID=MIC8888, Owner="Ciprian Abramov", Populated=DNP, Quantity Override=1, Revision=1, Status="MCL Design", Supplier 1=Digi-Key, Supplier 2=Mouser, Supplier Part Number 2=579-6003MA3B032K768, Symbol="DSC60xx DFN-4_LGA-4", TYPE=Oscillator

## Via types
v1: diameter 0.6, hole 0.3, L1 TOP to L6 BOT, 563 vias
v2: diameter 0.4, hole 0.2, L1 TOP to L6 BOT, tented both sides, 344 vias
v3: diameter 0.4, hole 0.2, L1 TOP to L6 BOT, 327 vias

## Nets (pads, with @x,y where several pads share a name; then routed paths per layer and width w, separated by ;. In a path a pad name is that pad's centre, name@x,y a point inside that pad or via, vN(x,y) a via of type N, cw(c..) or ccw(c..) an arc to the next point about the centre after c; other vN are vias at no path point)
+1.8V: C183.1 C187.2 U40.5 U44.18
+3.3_VBAT: C191.2 J19.1 R370.1 U36.9 | length 1.7
  L1 TOP w0.2: U36.9@139.7,47.4 140.494,47.4 140.825,47.069 141.031,47.069 C191.2@141.2,46.9
+3.3V: C53.2 C54.2 C75.2 C76.2 C83.2 C85.2 C86.2 C91.2 C96.2 C97.2 C109.2 C111.2 C112.2 C113.2 C114.2 C115.2 C158.2 C159.2 C177.2 C178.2 C180.1 C181.2 C182.1 C184.2 C185.2 C186.2 C188.2 C189.2 C195.2 C196.2 C197.2 C198.2 C199.2 C200.2 C201.2 C202.2 C203.2 J7.1 J7.3 J7.5 J7.7 J8.1 J8.3 J8.5 J8.7 J11.3 J12.3 J13.1 J31.3 J32.3 R97.1 R98.1 R101.1 R102.1 R107.1 R108.1 R117.2 R118.2 R121.1 R162.1 R163.1 R170.1 R171.1 R172.1 R173.1 R180.1 R181.1 R183.1 R184.1 R188.1 R189.1 R295.2 R299.1 R300.1 R301.1 R302.1 R365.1 R366.1 R367.1 R368.1 R388.2 R389.2 R390.2 R391.2 R392.2 R393.2 R395.2 R396.2 R397.2 R399.2 R403.1 R405.1 R406.1 R407.1 R423.1 R424.1 R425.1 R426.1 R427.1 R428.1 R429.1 R430.1 R452.1 R453.1 R458.1 R459.1 R503.1 R504.1 R505.1 R506.1 R516.1 R517.1 R518.1 R519.1 R529.2 R530.2 R531.1 R533.1 U5.14 U6.14 U7.14 U8.14 U9.26 U10.8 U11.8 U12.8 U13.8 U16.1 U17.1 U17.8 U18.1 U18.8 U19.1 U19.8 U35.8 U36.2 U37.16 U38.8 U40.1 U41.5 U42.5 U43.5 U45.1 U45.8 U46.1 U46.8 U48.2 U48.24 U49.1 U49.8 U50.1 U50.8 U51.1 U51.10 U52.5 U52.8 VR3.2 VR3.4 | length 14.6
  L1 TOP w0.2: U51.1@164.25,58.387 164.25,58.4 164.45,58.6 C199.2@166.4,58.6 ; U51.10@164.787,58.1 165.3,58.1 165.7,57.7 C198.2@166.4,57.7
  L1 TOP w0.4: R302.1@43.2,72.325 v3(43.2,72.8) ; R301.1@45,72.325 v3(45,72.8) ; R300.1@46.8,72.325 v3(46.8,72.8) ; R299.1@48.6,72.325 v3(48.6,72.8) ; C189.2@52.427,71.3 52.456,71.27 52.456,70.444 53.125,69.775 U46.8@53.125,69.25 ; v3(58.4,70.8) 58.4,71.175 R189.1@58.5,71.275 ; 101.8,25 101.8,25.675 C196.2@101.9,25.775 ; C177.2@133.8,56.6 133.8,57.799 U35.8@133.821,57.82 ; R392.2@135.175,45.1 R389.2@135.175,46.9 ; v3(136.231,48.25) 136.231,47.831 C178.2@136.2,47.8 136.3,47.7 136.684,47.7 136.934,47.45 137.45,47.45 U36.2@137.5,47.4
  other v2: 128.186,18.818 138.5,19.2 128.15,27.7 138.6,28.1
+3.3V_MCU: C17.1 C19.2 C20.2 C21.2 C22.2 C23.2 C24.2 C25.2 C26.2 C27.2 C133.2 C143.2 C144.2 C179.2 D33.2 J2.2 J17.1 R44.2 R79.2 R80.2 R213.2 R214.2 R398.2 U2.5 U2.9 U2.30 U2.43 U2.72 U2.80 U2.96 U2.134 U2.143 U39.1 VR2.2 VR2.4 | length 1.8
  L1 TOP w0.2: U39.1@129.255,44.25 129.565,44.25 130.015,43.8 C179.2@130.9,43.8
+3.3V_SOM: C7.2 C8.2 C36.2 C37.2 C38.2 R84.1 R93.2 R94.2 U3.4 U4.7 VR1.2 VR1.4
+5/12V_Solenoid: C139.2 C140.2 D11.1 D17.1 D18.1 D19.1 D20.1 D21.1 D22.1 D23.1 D24.1 D25.1 D26.1 D27.1 D28.1 D29.1 D30.1 D31.1 D32.1 J28.1 J28.3 J28.5 J28.7 J29.1 J29.3 J29.5 J29.7 J30.1 J30.3 J30.5 J30.7 J33.1 J33.3 J33.5 J33.7 JP6.2 R223.2 R224.2 U24.6 U30.5 U31.5 U32.5 U33.5
  other v2: 11.092,26.965 11.692,26.965 12.292,26.965 11.092,27.565 11.692,27.565 12.292,27.565 5.509,33.865 4.293,34.665 4.893,34.665 5.493,34.665
+5V: C106.2 C147.2 C148.2 C157.1 D12.1 J26.11 J27.11 JP7.2 R233.2 R234.2 R271.1 R274.1 R277.1 R280.1 U14.1 U25.6 VR3.3 | length 1.8
  L1 TOP w0.4: U14.1@136.7,41.45 137.06,41.45 137.16,41.55 137.16,41.666 137.394,41.9 C106.2@138.2,41.9
  other v2: 20.892,45.065 21.492,45.065 22.092,45.065 20.892,45.665 21.492,45.665 22.092,45.665 15.309,51.965 14.093,52.765 14.693,52.765 15.293,52.765
+5V_ADT2: C151.2 C165.2 C172.2 J1.9 JP5.1 JP7.1 JP10.1 JP11.1 R231.2 R253.2 R264.2 U25.5 U28.5 U29.5
  other v2: 4.4,40 5.3,40 4.4,40.6 5.3,40.6 14.2,49 15.1,49 4.4,49.2 5.3,49.2 14.2,49.6 15.1,49.6 4.4,49.8 5.3,49.8
+5V_HD4: C107.2 C108.2 C110.2 C170.2 C171.2 D16.1 JP11.2 R158.1 R160.1 R164.1 R165.1 R265.2 R266.2 U15.2 U15.28 U16.8 U29.6
  other v2: 11.092,45.265 11.692,45.265 12.292,45.265 11.092,45.865 11.692,45.865 12.292,45.865 5.509,52.165 4.293,52.965 4.893,52.965 5.493,52.965
+5V_MCU: C134.2 C135.2 C142.1 D10.1 JP3.2 R5.2 R218.2 R219.2 R227.2 R239.2 R240.2 R251.2 R252.2 R263.2 U23.6 VR2.3 | length 4.7
  L1 TOP w0.3: v2(5.7,26.4) R227.2@5.7,27.075 ; v2(5.7,53.9) R240.2@5.7,54.575 ; v2(6.6,35.5) R252.2@6.6,36.175 ; v2(6.6,44.7) R263.2@6.6,45.375 ; v2(15.5,25.9) R5.2@15.5,26.575 ; v2(15.5,44.5) R239.2@15.5,45.175 ; v2(15.5,53.9) R251.2@15.5,54.575
  other v2: 20.892,35.665 21.492,35.665 22.092,35.665 20.892,36.265 21.492,36.265 22.092,36.265 15.309,42.565 14.093,43.365 14.693,43.365 15.293,43.365
+5V_SAMA7: C1.2 C2.2 C6.1 C175.1 C190.1 C225.1 C227.1 C229.1 C230.1 D1.1 JP1.2 JP2.1 R2.2 R3.2 R328.2 R569.1 U1.6 U34.4 U34.10 U34.15 U34.20 U34.26 U34.31 VR1.3
  other v2: 20.892,26.465 21.492,26.465 22.092,26.465 20.892,27.065 21.492,27.065 22.092,27.065 15.309,33.365 14.093,34.165 14.693,34.165 15.293,34.165
+5V_TEC: C43.2 C44.2 C45.2 C46.2 C47.2 C48.2 C49.2 C50.2 C65.2 C66.2 C67.2 C68.2 C69.2 C70.2 C71.2 C72.2 C163.2 C164.2 D15.1 JP10.2 R256.2 R257.2 U5.4 U5.11 U6.4 U6.11 U7.4 U7.11 U8.4 U8.11 U28.6 | length 26.7
  L1 TOP w0.28: v2(121.55,25.2) 121.563,25.187 122.088,25.187 122.15,25.125 122.2,25.175 122.213,25.162 122.838,25.162 v2(122.85,25.15) 122.863,25.137 123.388,25.137 123.4,25.125 123.46,25.185 U7.4@124.79,25.185 ; v2(121.586,16.318) 121.599,16.306 122.124,16.306 122.186,16.243 122.236,16.293 122.249,16.281 122.874,16.281 v2(122.886,16.268) 122.899,16.256 123.424,16.256 123.436,16.243 123.496,16.303 U8.4@124.826,16.303 ; U7.11@128.01,25.2 128.995,25.2 129.2,25.405 129.2,25.425 129.213,25.413 129.738,25.413 129.773,25.377 130.298,25.377 130.4,25.275 130.411,25.275 130.69,24.996 130.69,24.985 130.727,24.948 130.727,24.723 v2(130.75,24.7) ; U8.11@128.046,16.318 129.031,16.318 129.236,16.524 129.236,16.543 129.249,16.531 129.774,16.531 129.809,16.495 130.334,16.495 130.436,16.393 130.447,16.393 130.726,16.114 130.726,16.103 130.763,16.066 130.763,15.841 v2(130.786,15.818) ; v2(131.9,16.7) 131.923,16.677 132.448,16.677 132.5,16.625 132.583,16.625 132.585,16.627 133.177,16.627 133.223,16.673 133.798,16.673 133.81,16.685 U6.4@135.14,16.685 ; v2(132,25.6) 132.013,25.587 132.538,25.587 132.6,25.525 132.65,25.575 132.662,25.562 133.288,25.562 v2(133.3,25.55) 133.312,25.537 133.837,25.537 133.85,25.525 133.91,25.585 U5.4@135.24,25.585 ; U6.11@138.175,16.7 139.516,16.7 139.562,16.747 139.562,16.913 140.087,16.913 140.123,16.877 140.648,16.877 140.75,16.775 140.761,16.775 141.04,16.496 141.04,16.485 141.077,16.448 141.077,16.223 v2(141.1,16.2) ; U5.11@138.46,25.6 139.445,25.6 139.65,25.805 139.65,25.825 139.662,25.813 140.187,25.813 140.223,25.777 140.748,25.777 140.85,25.675 140.861,25.675 141.14,25.396 141.14,25.385 141.177,25.348 141.177,25.123 v2(141.2,25.1)
  other v2: 129.786,16.518 133.2,16.65 140.1,16.9 129.75,25.4 140.2,25.8 11.092,36.065 11.692,36.065 12.292,36.065 11.092,36.665 11.692,36.665 12.292,36.665 5.509,42.965 4.293,43.765 4.893,43.765 5.493,43.765
+5V_USB_ADT1: C3.2 C9.2 D2.5 J1.4 JP1.1 R1.2 U1.5
  other v2: 14.2,30.4 15.1,30.4 14.2,31 15.1,31
+5V_USB_ADT2: C10.2 C136.2 D3.5 J1.8 JP3.1 R217.2 TP3.0 U23.5 | length 0.7
  L1 TOP w0.3: v2(16.4,35.1) R217.2@16.4,35.775
  other v2: 14.2,39.6 15.1,39.6 14.2,40.2 15.1,40.2
+12V_ADT2: C152.2 C162.2 J1.10 JP4.1 JP8.1 JP9.1 R232.2 R247.2 U26.5 U27.5
  other v2: 4.4,58.4 5.3,58.4 14.2,58.4 15.1,58.4 4.4,59 5.3,59 14.2,59 15.1,59
+12V_Heater: C84.2 D6.1 D7.1 D8.1 D9.1 J6.1 J6.3 J6.5 J6.7
+12V_Laser: C160.2 C161.2 D14.1 J24.1 J25.1 JP9.2 R248.2 R249.2 U27.6
  other v2: 20.892,54.465 21.492,54.465 22.092,54.465 20.892,55.065 21.492,55.065 22.092,55.065 15.309,61.365 14.093,62.165 14.693,62.165 15.293,62.165
+12V_Photo: C149.2 C150.2 D13.1 J20.1 J21.1 J22.1 JP8.2 R235.2 R236.2 U26.6 | length 1.1
  L1 TOP w0.28: v3@52.999,73.501 J22.1@53,74.6
  other v2: 11.092,54.465 11.692,54.465 12.292,54.465 11.092,55.065 11.692,55.065 12.292,55.065 5.509,61.365 4.293,62.165 4.893,62.165 5.493,62.165
  other v3: 52.999,73.5
+VDDCORE: C18.1 C28.2 C29.2 C30.2 C31.2 C32.2 C33.2 C34.2 C35.2 U2.3 U2.29 U2.33 U2.50 U2.81 U2.107 U2.123 U2.139
_PA0: R371.2 U54.H17
_PA1: R372.2 U54.G20
_PA2: R374.2 U54.L13
_PA3: R376.2 U54.L14
_PA4: R378.2 U54.K13
_PA5: R381.2 U54.C21
_PA6: R384.2 U54.K14
_PA7: R386.2 U54.H16
_PA8: R404.2 U54.B21
_PA9: R455.2 U54.D20
_PA10: R457.2 U54.J15
_PA11: R463.2 U54.F20
_PA12: R546.1 R547.2 U54.V14
_PA13: R548.1 R549.2 U54.AA16
_PA14: R550.1 R551.2 U54.AA20
_PA17: R470.2 U54.V16
_PA18: R474.2 U54.Y16
_PA20: R475.2 U54.Y21
_PA22: R478.2 U54.Y18
_PA26: R537.2 U54.W16
_PA27: R538.2 U54.W18
_PA28: R539.2 U54.T14
_PA29: R540.2 U54.W19
_PA30: U54.R14
_PA31: U54.W20
_PB0: U54.U18
_PB1: U54.W21
_PB2: U54.T21
_PB4: R379.2 U54.T20
_PB5: R382.2 U54.V18
_PB6: R385.2 U54.T19
_PB7: R387.2 U54.V17
_PB8: R454.2 U54.T18
_PB9: R456.2 U54.P17
_PB10: R462.2 U54.P15
_PB11: R464.2 U54.G21
_PB12: R465.2 U54.M15
_PB13: R467.2 U54.R16
_PB14: R468.2 U54.N14
_PB28: U54.G10
_PB29: R541.2 U54.H11
_PB30: R544.2 U54.B9
_PB31: R545.2 U54.A13
_PC0: R552.2 U54.A9
_PC1: R553.2 U54.H10
_PC2: R554.2 U54.A7
_PC3: R476.1 R477.2 U54.G1
_PC4: R535.1 R536.2 R555.2 U54.H5
_PC5: R542.1 R543.2 U54.F2
_PC7: U54.J8
_PC8: U54.F1
_PC9: R303.2 R310.1 R325.2 U54.G2
_PC10: R298.2 R305.1 R327.2 U54.M10
_PC11: R556.2 U54.K9
_PC12: R557.2 U54.D1
_PC13: R558.2 U54.F8
_PC14: R559.2 U54.D6
_PC15: R560.2 U54.H9
_PD16: R561.2 U54.D18
_PD17: R562.2 U54.G18
_PD18: R563.2 U54.B19
_PD19: R564.2 U54.N11
_PD22: R565.2 U54.A19
_PD23: R566.2 U54.K12
_PD25: R567.2 U54.K10
_PD28: R568.2 U54.J12
_PD30: R577.1 U54.H13
_PD31: R579.1 U54.C16
_PE2: R373.2 U54.A18
_PE3: R375.2 U54.C15
_PE4: R377.2 U54.D15
_PE5: R380.2 U54.B16
_PE6: R383.2 U54.G13
ADC_SWITCH: R522.1 U9.14 U9.15 U9.16 U9.17 U9.18 U9.19 U9.20 U9.21
ADC_TEMP1: C88.2 R100.2 R133.2 | length 44.1
  L1 TOP w0.2: v3(113.4,19.2) 112.207,19.2 111.75,19.657 111.75,27.811 112.063,28.124 112.137,28.124 112.45,28.436 112.45,30.95 114.656,33.156 114.656,46.487 115.9,47.731 v3(115.9,50.4)
  L6 BOT w0.2: v3(113.4,19.2) 113.413,19.213 113.413,19.787 113.425,19.8 113.413,19.813 113.413,20.687 C88.2@113.4,20.7 ; v3(115.9,50.4) 115.954,50.4 116.104,50.55 116.717,50.55 117.017,50.85 119.581,50.85 119.881,50.55 123.8,50.55
ADC_TEMP2: C93.2 R104.2 R139.2 | length 32.5
  L1 TOP w0.2: v3(115,28.4) 115,32.934 115.056,32.99 115.056,46.321 116.4,47.666 v3(116.4,50.1)
  L6 BOT w0.2: C93.2@113.4,27.5 113.475,27.425 114.9,27.425 114.975,27.5 114.988,27.5 114.988,28.387 v3(115,28.4) ; v3(116.4,50.1) 116.438,50.138 116.871,50.138 117.182,50.45 119.416,50.45 119.716,50.15 120.218,50.15 120.318,50.05 123.8,50.05
ADC_TEMP3: C99.2 R145.2 R297.1 | length 53.8
  L1 TOP w0.2: v3(112.7,9.7) 112.662,9.738 112.269,9.738 111.5,10.507 111.5,18.776 110.95,19.326 110.95,30.314 111.65,31.014 111.65,31.35 113.856,33.556 113.856,48.656 v3(114.9,49.7)
  L6 BOT w0.2: v3(112.7,9.7) R145.2@113.4,10.4 113.425,10.4 113.413,10.413 113.413,11.288 C99.2@113.4,11.3 ; v3(114.9,49.7) 115.836,49.7 115.9,49.636 116.934,49.636 117.348,50.05 119.25,50.05 119.55,49.75 119.918,49.75 120.118,49.55 123.8,49.55
ADC_TEMP4: C103.2 R151.2 R520.1 | length 47.7
  L1 TOP w0.2: v3(115.3,49.2) 114.256,48.156 114.256,33.379 112.05,31.173 112.05,29.386 111.35,28.686 111.35,19.491 112.141,18.7 113.039,18.7 115.446,18.7 115.546,18.8 v3(115.6,18.8)
  L6 BOT w0.2: C103.2@113.4,18.1 113.475,18.025 114.9,18.025 115.169,18.294 115.169,18.683 115.286,18.8 v3(115.6,18.8) ; v3(115.3,49.2) 115.314,49.214 117.078,49.214 117.514,49.65 119.084,49.65 119.384,49.35 119.752,49.35 119.952,49.15 121.416,49.15 121.516,49.05 123.8,49.05
ADC_TEMP5: C90.2 R134.2 R524.2 | length 39.7
  L1 TOP w0.2: C90.2@117.6,20.7 117.587,20.687 117.587,19.812 117.575,19.8 R134.2@117.6,19.8 118.2,19.2 118.986,19.2 119.136,19.35 119.586,19.35 119.85,19.614 119.85,19.986 119.3,20.536 119.3,30.2 116.4,33.1 116.4,45.5 v3(119.4,48.5)
  L6 BOT w0.2: v3(119.4,48.5) 119.454,48.5 119.604,48.35 121.084,48.35 121.384,48.05 123.8,48.05
ADC_TEMP6: C95.2 R140.2 R523.2 | length 31.9
  L1 TOP w0.2: R140.2@116.025,27.5 116.1,27.425 117.525,27.425 C95.2@117.6,27.5 117.575,27.5 117.074,28.001 116.999,28.001 115.456,29.544 115.456,46.156 118.117,48.817 117.734,49.2 v3(117.7,49.2)
  L6 BOT w0.2: v3(117.7,49.2) 118.969,49.2 119.219,48.95 119.586,48.95 119.786,48.75 121.25,48.75 121.45,48.55 123.8,48.55
ADC_TEMP7: C101.2 R146.2 R521.1 | length 52.6
  L1 TOP w0.2: C101.2@117.6,11.3 117.587,11.287 117.587,10.412 117.575,10.4 R146.2@117.6,10.4 118.2,9.8 119.9,9.8 120.65,10.55 120.65,20.318 120.1,20.868 120.1,32.3 117.55,34.85 117.55,45.15 120.1,47.7 v3(120.1,52.4)
  L6 BOT w0.2: v3(120.1,52.4) 121.429,52.4 121.779,52.05 123.8,52.05
ADC_TEMP8: C105.2 R152.2 R526.2 | length 40.2
  L1 TOP w0.2: R152.2@116.025,18.1 116.1,18.025 117.525,18.025 117.587,18.087 C105.2@117.6,18.1 ; C105.2@117.575,18.1 117.575,18.6 117.775,18.8 119.152,18.8 119.302,18.95 119.752,18.95 120.25,19.448 120.25,20.152 119.7,20.702 119.7,32.134 117.1,34.734 117.1,45.5 v3(119.1,47.5)
  L6 BOT w0.15: v3(119.1,47.5) 121.675,47.5 122.125,47.05 123.8,47.05
ADT1_USB2.0_N: D2.3 J1.2 | length 12.1
  L1 TOP w0.22: J1.2@14,7.87 14,8.07 13.81,8.26 13.564,8.26 13.435,8.389 13.435,8.572 16.638,11.774 17.28,11.774 19.921,14.415 20.651,14.415 20.78,14.286 20.78,14.205 21.335,13.65 D2.3@21.645,13.65
ADT1_USB2.0_P: D2.1 J1.1 | length 12.7
  L1 TOP w0.22: J1.1@12.5,7.87 12.5,8.07 12.69,8.26 12.936,8.26 13.065,8.389 13.065,8.725 16.484,12.144 17.127,12.144 19.768,14.785 20.651,14.785 20.78,14.914 20.78,14.995 21.335,15.55 D2.1@21.645,15.55
ADT1_USB_D_N: D2.4 R336.1 | length 50
  L1 TOP w0.22: D2.4@24.141,13.636 D2.4@24.155,13.65 24.972,13.65 v3(24.986,13.664)
  L6 BOT w0.22: v3(24.986,13.664) 25.021,13.698 25.021,14.061 25.24,14.28 25.24,14.3 25.369,14.429 26.052,14.429 32.953,21.33 70.698,21.33
ADT1_USB_D_P: D2.6 R337.1 | length 12.1
  L1 TOP w0.22: D2.6@24.141,15.536 D2.6@24.155,15.55 24.972,15.55 v3(24.986,15.564)
  L6 BOT w0.22: v3(24.986,15.564) 25.021,15.529 25.021,15.147 25.369,14.799 25.899,14.799 32.8,21.7
ADT2_USB2.0_N: D3.3 J1.6 | length 5.2
  L1 TOP w0.22: J1.6@20,7.87 20,8.07 19.81,8.26 19.615,8.26 19.486,8.389 19.486,9.927 20.393,10.834 20.575,10.834 20.763,10.646 20.763,10.616 21.259,10.12 D3.3@21.569,10.12
ADT2_USB2.0_P: D3.1 J1.5 | length 5.9
  L1 TOP w0.22: J1.5@18.5,7.87 18.5,8.07 18.69,8.26 18.885,8.26 19.014,8.389 19.014,10.123 20.197,11.306 20.575,11.306 20.763,11.494 20.763,11.524 21.259,12.02 D3.1@21.569,12.02
ADT2_USB_D_N: D3.4 U2.136 | length 118.1
  L1 TOP w0.22: D3.4@24.065,10.106 D3.4@24.079,10.12 24.897,10.12 v3(24.91,10.134)
  L6 BOT w0.22: v3(24.91,10.134) 24.945,10.168 24.945,10.531 25.164,10.75 25.164,10.774 25.293,10.903 31.373,10.903 38.34,17.87 57.344,17.87 57.434,17.96 71.87,17.96 71.96,17.87 72.84,17.87 74.33,19.36 85.783,19.36 87.516,21.092 105.087,21.092 114.725,30.73 119.63,30.73 121.7,32.8 125.968,32.8 129.585,36.417 129.585,36.806 129.635,36.856 129.635,37.735 U2.136@129.65,37.75
ADT2_USB_D_P: D3.6 U2.137 | length 117.5
  L1 TOP w0.22: D3.6@24.079,12.02 24.093,12.034 24.91,12.034 v3(24.924,12.048)
  L6 BOT w0.22: v3(24.924,12.048) 24.959,12.013 24.959,11.607 25.293,11.273 31.22,11.273 38.187,18.24 57.191,18.24 57.281,18.33 72.023,18.33 72.113,18.24 72.687,18.24 74.177,19.73 85.63,19.73 87.362,21.462 104.934,21.462 114.572,31.1 119.477,31.1 121.547,33.17 125.815,33.17 129.215,36.57 129.215,36.806 129.165,36.856 129.165,37.735 U2.137@129.15,37.75
BMP390_INT: R11.1 R531.2 U51.7 | length 0.7
  L6 BOT w0.2: v3(127.8,32.1) 127.838,32.137 128.463,32.137 R11.1@128.5,32.175
CAM1_CK_N: J26.5 R177.2 | length 13.4
  L1 TOP w0.18: R177.2@65.375,67.5 65.217,67.342 64.78,67.342 64.215,66.777 64.066,66.777 63.3,67.543 63.3,69.6 65.873,72.173 67.805,72.173 68.19,72.559 68.206,72.559 68.625,72.978 68.625,73.06 68.49,73.195 68.49,73.785 68.595,73.89 68.64,73.89 68.95,74.2 J26.5@68.95,74.6
  other v3: 68.625,73
CAM1_CK_P: J26.6 R176.2 | length 13.8
  L1 TOP w0.18: R176.2@65.375,65.7 65.35,65.7 64.89,66.16 64.518,66.16 64.232,66.447 63.929,66.447 62.97,67.406 62.97,69.737 65.737,72.503 67.668,72.503 67.983,72.818 67.983,72.958 v3(68.025,73) 68.025,73.06 68.16,73.195 68.16,73.785 68.055,73.89 68.01,73.89 67.7,74.2 J26.6@67.7,74.6
CAM1_D0_N: J26.1 R211.2 | length 9.6